# Altium PCB L50T-TEST.PcbDoc (part 3 of 3)
Units mil, origin at the board's own origin, x right, y up, seen from the top; angles counter-clockwise.
Board outline 6860.42 x 9197.04 mil, 2 copper layers (Top Layer, Bottom Layer); 174 components, 146 nets, 565 pads, 293 vias.
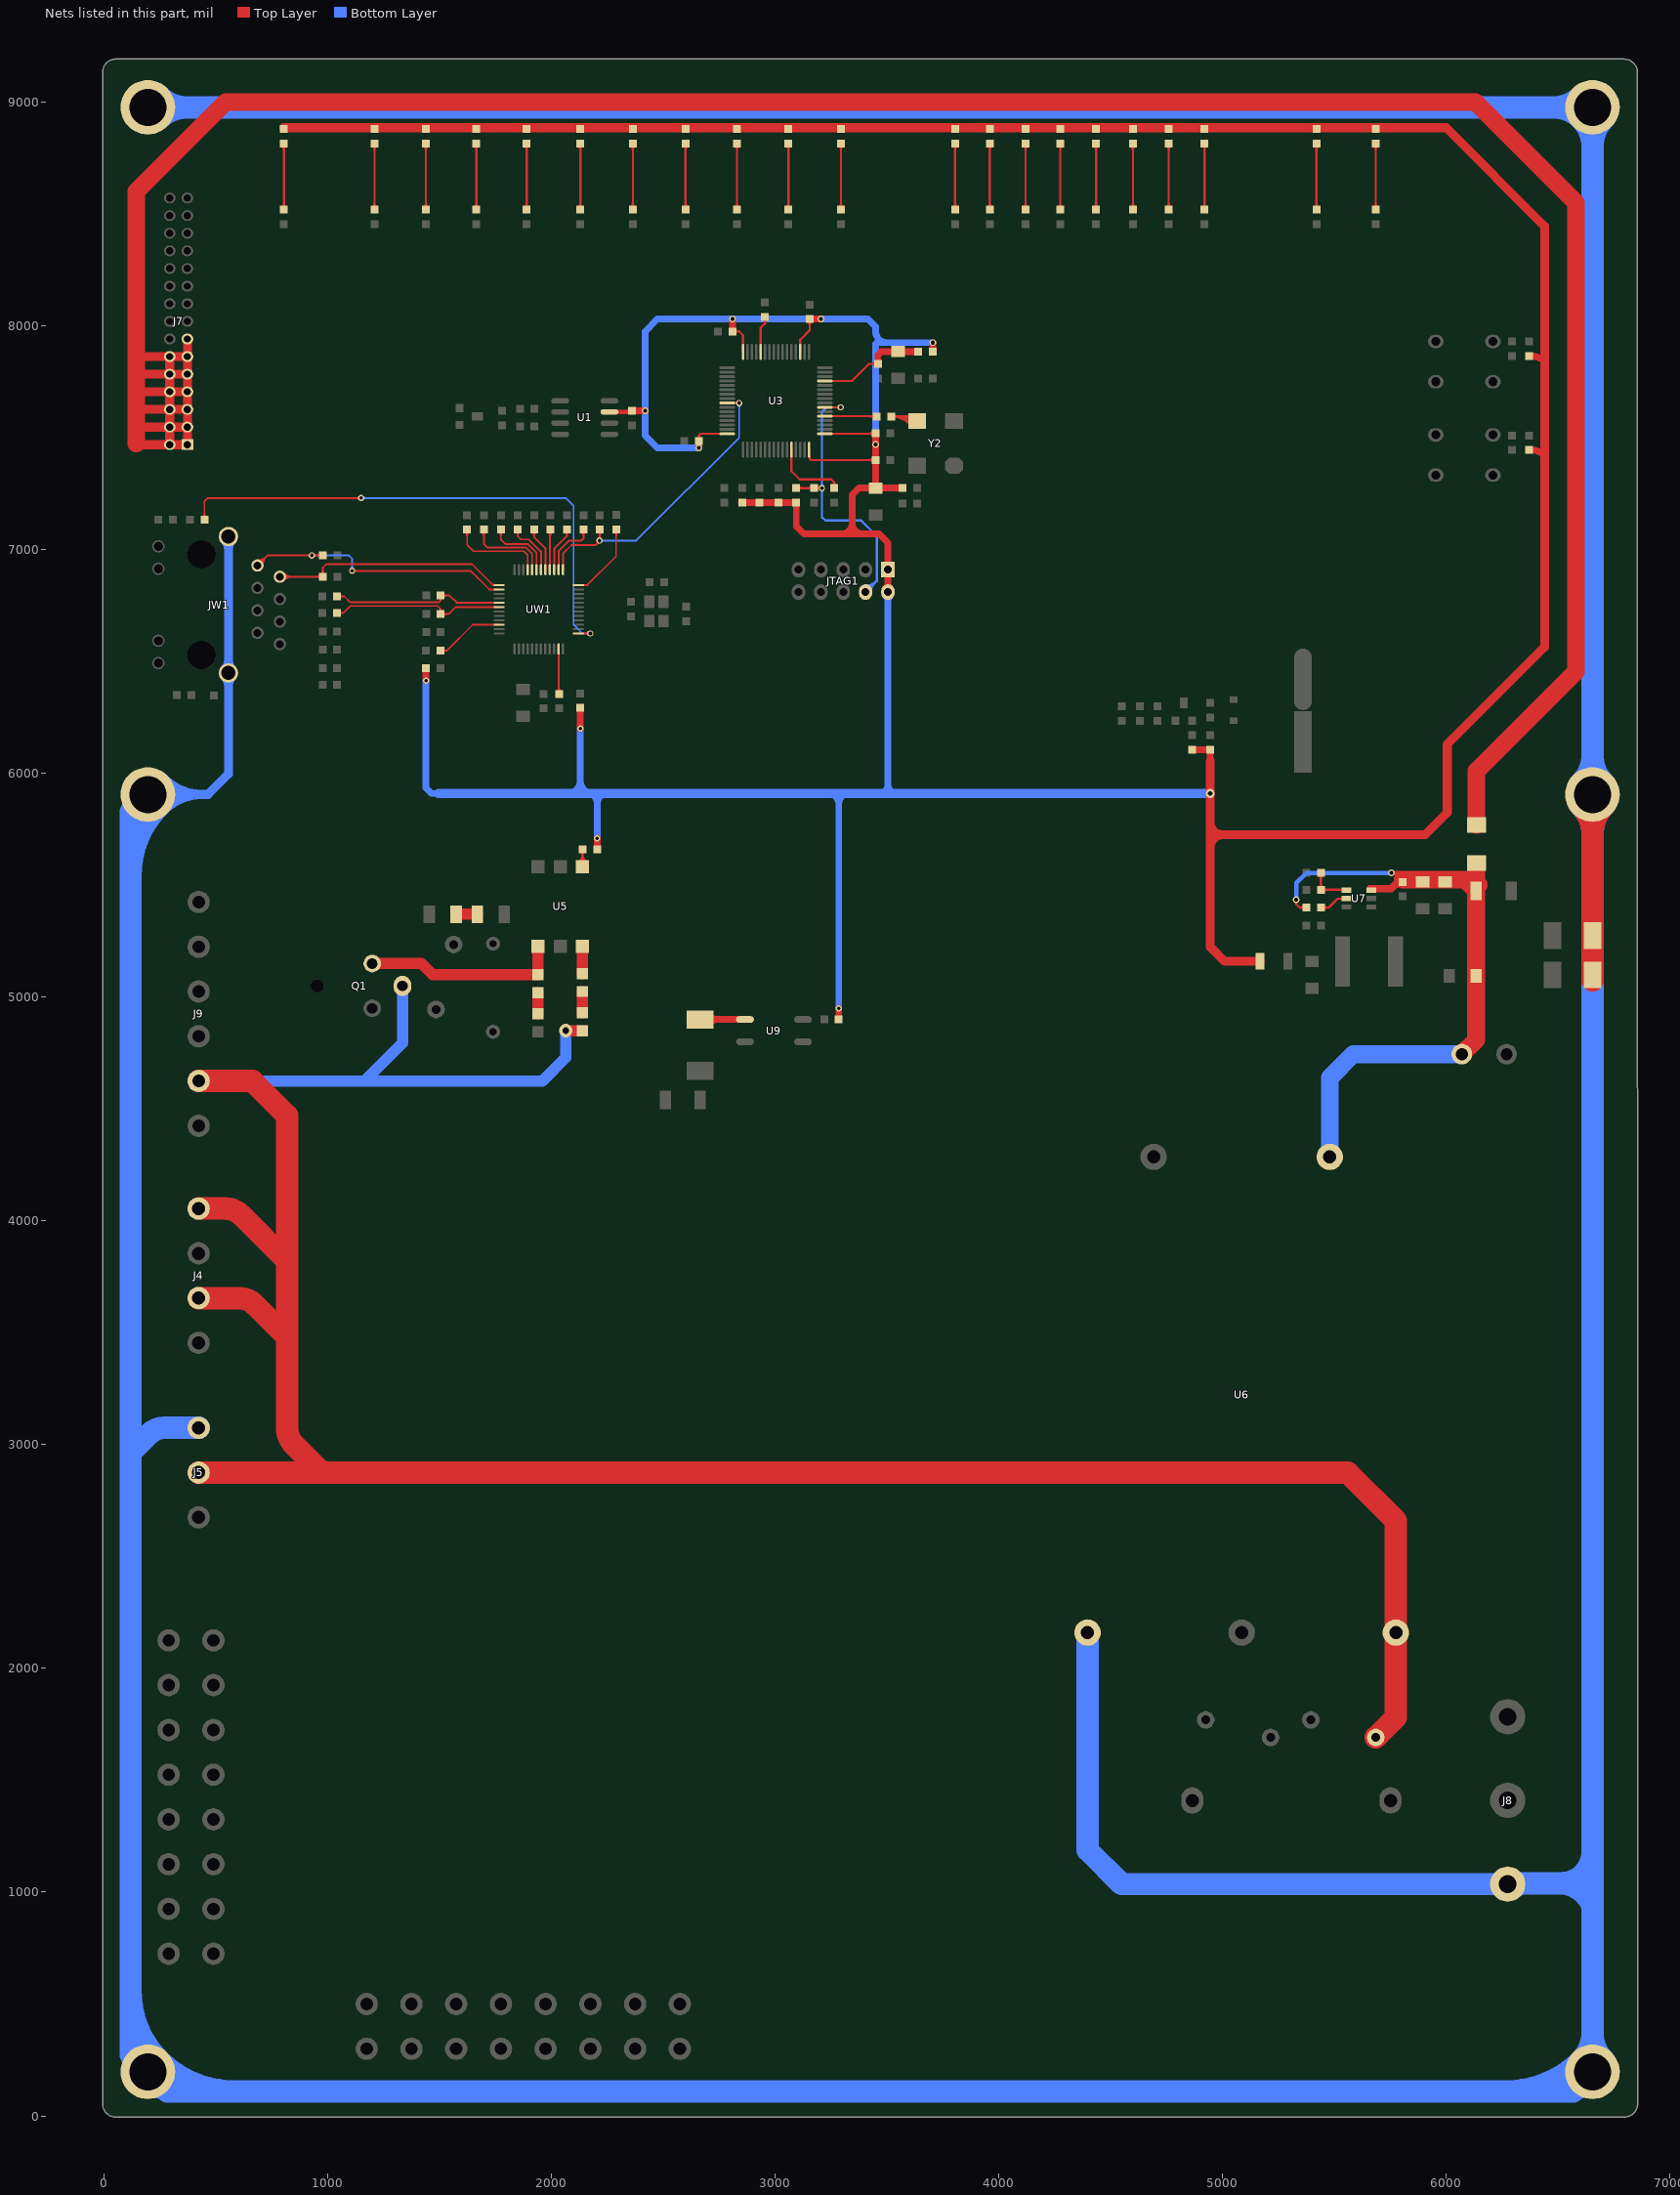
[diagram p3: the nets of this part, all layers, seen from the top]

## Via types
v1: diameter 30, hole 18, Top Layer to Bottom Layer, tented both sides, 242 vias
v2: diameter 28, hole 16, Top Layer to Bottom Layer, tented both sides, 44 vias
v3: diameter 40, hole 20, Top Layer to Bottom Layer, tented both sides, 5 vias
v4: diameter 60, hole 30, Top Layer to Bottom Layer, tented both sides, 2 vias

## Nets (pads, with @x,y where several pads share a name; then routed paths per layer and width w, separated by ;. In a path a pad name is that pad's centre, name@x,y a point inside that pad or via, vN(x,y) a via of type N, cw(c..) or ccw(c..) an arc to the next point about the centre after c; other vN are vias at no path point) (continued)
NetLED1_2: LED1.2 R11.2 | length 484.6
  Top Layer w10: R11.2@1210,8520 LED1.2@1210,8815 ; 1210,8550.18 ccw(c1240.18,8550.18) 1218.84,8528.84 cw(c1240.18,8550.18) 1210,8550.18 ; 1210,8550.18 cw(c1179.82,8550.18) 1201.16,8528.84 ccw(c1179.82,8550.18) 1210,8550.18 ; 1210,8784.82 ccw(c1179.82,8784.82) 1201.16,8806.16 cw(c1179.82,8784.82) 1210,8784.82 ; 1210,8784.82 cw(c1240.18,8784.82) 1218.84,8806.16 ccw(c1240.18,8784.82) 1210,8784.82
NetLED2_2: LED2.2 R12.2 | length 484.6
  Top Layer w10: R12.2@1440,8520 LED2.2@1440,8815 ; 1440,8550.18 ccw(c1470.18,8550.18) 1448.84,8528.84 cw(c1470.18,8550.18) 1440,8550.18 ; 1440,8550.18 cw(c1409.82,8550.18) 1431.16,8528.84 ccw(c1409.82,8550.18) 1440,8550.18 ; 1440,8784.82 ccw(c1409.82,8784.82) 1431.16,8806.16 cw(c1409.82,8784.82) 1440,8784.82 ; 1440,8784.82 cw(c1470.18,8784.82) 1448.84,8806.16 ccw(c1470.18,8784.82) 1440,8784.82
NetLED3_2: LED3.2 R13.2 | length 484.6
  Top Layer w10: R13.2@1665,8520 LED3.2@1665,8815 ; 1665,8550.18 ccw(c1695.18,8550.18) 1673.84,8528.84 cw(c1695.18,8550.18) 1665,8550.18 ; 1665,8550.18 cw(c1634.82,8550.18) 1656.16,8528.84 ccw(c1634.82,8550.18) 1665,8550.18 ; 1665,8784.82 ccw(c1634.82,8784.82) 1656.16,8806.16 cw(c1634.82,8784.82) 1665,8784.82 ; 1665,8784.82 cw(c1695.18,8784.82) 1673.84,8806.16 ccw(c1695.18,8784.82) 1665,8784.82
NetLED4_2: LED4.2 R14.2 | length 484.6
  Top Layer w10: R14.2@1890,8520 LED4.2@1890,8815 ; 1890,8550.18 ccw(c1920.18,8550.18) 1898.84,8528.84 cw(c1920.18,8550.18) 1890,8550.18 ; 1890,8550.18 cw(c1859.82,8550.18) 1881.16,8528.84 ccw(c1859.82,8550.18) 1890,8550.18 ; 1890,8784.82 ccw(c1859.82,8784.82) 1881.16,8806.16 cw(c1859.82,8784.82) 1890,8784.82 ; 1890,8784.82 cw(c1920.18,8784.82) 1898.84,8806.16 ccw(c1920.18,8784.82) 1890,8784.82
NetLED5_2: LED5.2 R15.2 | length 484.6
  Top Layer w10: R15.2@2130,8520 LED5.2@2130,8815 ; 2130,8550.18 ccw(c2160.18,8550.18) 2138.84,8528.84 cw(c2160.18,8550.18) 2130,8550.18 ; 2130,8550.18 cw(c2099.82,8550.18) 2121.16,8528.84 ccw(c2099.82,8550.18) 2130,8550.18 ; 2130,8784.82 ccw(c2099.82,8784.82) 2121.16,8806.16 cw(c2099.82,8784.82) 2130,8784.82 ; 2130,8784.82 cw(c2160.18,8784.82) 2138.84,8806.16 ccw(c2160.18,8784.82) 2130,8784.82
NetLED6_2: LED6.2 R16.2 | length 484.6
  Top Layer w10: R16.2@2365,8520 LED6.2@2365,8815 ; 2365,8550.18 ccw(c2395.18,8550.18) 2373.84,8528.84 cw(c2395.18,8550.18) 2365,8550.18 ; 2365,8550.18 cw(c2334.82,8550.18) 2356.16,8528.84 ccw(c2334.82,8550.18) 2365,8550.18 ; 2365,8784.82 ccw(c2334.82,8784.82) 2356.16,8806.16 cw(c2334.82,8784.82) 2365,8784.82 ; 2365,8784.82 cw(c2395.18,8784.82) 2373.84,8806.16 ccw(c2395.18,8784.82) 2365,8784.82
NetLED7_2: LED7.2 R17.2 | length 484.6
  Top Layer w10: R17.2@2600,8520 LED7.2@2600,8815 ; 2600,8550.18 ccw(c2630.18,8550.18) 2608.84,8528.84 cw(c2630.18,8550.18) 2600,8550.18 ; 2600,8550.18 cw(c2569.82,8550.18) 2591.16,8528.84 ccw(c2569.82,8550.18) 2600,8550.18 ; 2600,8784.82 ccw(c2569.82,8784.82) 2591.16,8806.16 cw(c2569.82,8784.82) 2600,8784.82 ; 2600,8784.82 cw(c2630.18,8784.82) 2608.84,8806.16 ccw(c2630.18,8784.82) 2600,8784.82
NetLED8_2: LED8.2 R18.2 | length 484.6
  Top Layer w10: R18.2@2830,8520 LED8.2@2830,8815 ; 2830,8550.18 ccw(c2860.18,8550.18) 2838.84,8528.84 cw(c2860.18,8550.18) 2830,8550.18 ; 2830,8550.18 cw(c2799.82,8550.18) 2821.16,8528.84 ccw(c2799.82,8550.18) 2830,8550.18 ; 2830,8784.82 ccw(c2799.82,8784.82) 2821.16,8806.16 cw(c2799.82,8784.82) 2830,8784.82 ; 2830,8784.82 cw(c2860.18,8784.82) 2838.84,8806.16 ccw(c2860.18,8784.82) 2830,8784.82
NetLED9_2: LED9.2 R19.2 | length 484.6
  Top Layer w10: R19.2@3060,8520 LED9.2@3060,8815 ; 3060,8550.18 ccw(c3090.18,8550.18) 3068.84,8528.84 cw(c3090.18,8550.18) 3060,8550.18 ; 3060,8550.18 cw(c3029.82,8550.18) 3051.16,8528.84 ccw(c3029.82,8550.18) 3060,8550.18 ; 3060,8784.82 ccw(c3029.82,8784.82) 3051.16,8806.16 cw(c3029.82,8784.82) 3060,8784.82 ; 3060,8784.82 cw(c3090.18,8784.82) 3068.84,8806.16 ccw(c3090.18,8784.82) 3060,8784.82
NetLED10_2: LED10.2 R20.2 | length 484.6
  Top Layer w10: R20.2@3295,8520 LED10.2@3295,8815 ; 3295,8550.18 ccw(c3325.18,8550.18) 3303.84,8528.84 cw(c3325.18,8550.18) 3295,8550.18 ; 3295,8550.18 cw(c3264.82,8550.18) 3286.16,8528.84 ccw(c3264.82,8550.18) 3295,8550.18 ; 3295,8784.82 ccw(c3264.82,8784.82) 3286.16,8806.16 cw(c3264.82,8784.82) 3295,8784.82 ; 3295,8784.82 cw(c3325.18,8784.82) 3303.84,8806.16 ccw(c3325.18,8784.82) 3295,8784.82
NetLED11_2: LED11.2 R23.2 | length 484.6
  Top Layer w10: R23.2@3805,8520 LED11.2@3805,8815 ; 3805,8550.18 ccw(c3835.18,8550.18) 3813.84,8528.84 cw(c3835.18,8550.18) 3805,8550.18 ; 3805,8550.18 cw(c3774.82,8550.18) 3796.16,8528.84 ccw(c3774.82,8550.18) 3805,8550.18 ; 3805,8784.82 ccw(c3774.82,8784.82) 3796.16,8806.16 cw(c3774.82,8784.82) 3805,8784.82 ; 3805,8784.82 cw(c3835.18,8784.82) 3813.84,8806.16 ccw(c3835.18,8784.82) 3805,8784.82
NetLED12_2: LED12.2 R24.2 | length 484.6
  Top Layer w10: R24.2@3960,8520 LED12.2@3960,8815 ; 3960,8550.18 ccw(c3990.18,8550.18) 3968.84,8528.84 cw(c3990.18,8550.18) 3960,8550.18 ; 3960,8550.18 cw(c3929.82,8550.18) 3951.16,8528.84 ccw(c3929.82,8550.18) 3960,8550.18 ; 3960,8784.82 ccw(c3929.82,8784.82) 3951.16,8806.16 cw(c3929.82,8784.82) 3960,8784.82 ; 3960,8784.82 cw(c3990.18,8784.82) 3968.84,8806.16 ccw(c3990.18,8784.82) 3960,8784.82
NetLED13_2: LED13.2 R25.2 | length 484.6
  Top Layer w10: R25.2@4120,8520 LED13.2@4120,8815 ; 4120,8550.18 ccw(c4150.18,8550.18) 4128.84,8528.84 cw(c4150.18,8550.18) 4120,8550.18 ; 4120,8550.18 cw(c4089.82,8550.18) 4111.16,8528.84 ccw(c4089.82,8550.18) 4120,8550.18 ; 4120,8784.82 ccw(c4089.82,8784.82) 4111.16,8806.16 cw(c4089.82,8784.82) 4120,8784.82 ; 4120,8784.82 cw(c4150.18,8784.82) 4128.84,8806.16 ccw(c4150.18,8784.82) 4120,8784.82
NetLED14_2: LED14.2 R26.2 | length 484.6
  Top Layer w10: R26.2@4275,8520 LED14.2@4275,8815 ; 4275,8550.18 ccw(c4305.18,8550.18) 4283.84,8528.84 cw(c4305.18,8550.18) 4275,8550.18 ; 4275,8550.18 cw(c4244.82,8550.18) 4266.16,8528.84 ccw(c4244.82,8550.18) 4275,8550.18 ; 4275,8784.82 ccw(c4244.82,8784.82) 4266.16,8806.16 cw(c4244.82,8784.82) 4275,8784.82 ; 4275,8784.82 cw(c4305.18,8784.82) 4283.84,8806.16 ccw(c4305.18,8784.82) 4275,8784.82
NetLED15_2: LED15.2 R27.2 | length 484.6
  Top Layer w10: R27.2@4435,8520 LED15.2@4435,8815 ; 4435,8550.18 ccw(c4465.18,8550.18) 4443.84,8528.84 cw(c4465.18,8550.18) 4435,8550.18 ; 4435,8550.18 cw(c4404.82,8550.18) 4426.16,8528.84 ccw(c4404.82,8550.18) 4435,8550.18 ; 4435,8784.82 ccw(c4404.82,8784.82) 4426.16,8806.16 cw(c4404.82,8784.82) 4435,8784.82 ; 4435,8784.82 cw(c4465.18,8784.82) 4443.84,8806.16 ccw(c4465.18,8784.82) 4435,8784.82
NetLED16_2: LED16.2 R28.2 | length 484.6
  Top Layer w10: R28.2@4600,8520 LED16.2@4600,8815 ; 4600,8550.18 ccw(c4630.18,8550.18) 4608.84,8528.84 cw(c4630.18,8550.18) 4600,8550.18 ; 4600,8550.18 cw(c4569.82,8550.18) 4591.16,8528.84 ccw(c4569.82,8550.18) 4600,8550.18 ; 4600,8784.82 ccw(c4569.82,8784.82) 4591.16,8806.16 cw(c4569.82,8784.82) 4600,8784.82 ; 4600,8784.82 cw(c4630.18,8784.82) 4608.84,8806.16 ccw(c4630.18,8784.82) 4600,8784.82
NetLED17_2: LED17.2 R29.2 | length 484.6
  Top Layer w10: R29.2@4760,8520 LED17.2@4760,8815 ; 4760,8550.18 ccw(c4790.18,8550.18) 4768.84,8528.84 cw(c4790.18,8550.18) 4760,8550.18 ; 4760,8550.18 cw(c4729.82,8550.18) 4751.16,8528.84 ccw(c4729.82,8550.18) 4760,8550.18 ; 4760,8784.82 ccw(c4729.82,8784.82) 4751.16,8806.16 cw(c4729.82,8784.82) 4760,8784.82 ; 4760,8784.82 cw(c4790.18,8784.82) 4768.84,8806.16 ccw(c4790.18,8784.82) 4760,8784.82
NetLED18_2: LED18.2 R30.2 | length 484.6
  Top Layer w10: R30.2@4920,8520 LED18.2@4920,8815 ; 4920,8550.18 ccw(c4950.18,8550.18) 4928.84,8528.84 cw(c4950.18,8550.18) 4920,8550.18 ; 4920,8550.18 cw(c4889.82,8550.18) 4911.16,8528.84 ccw(c4889.82,8550.18) 4920,8550.18 ; 4920,8784.82 ccw(c4889.82,8784.82) 4911.16,8806.16 cw(c4889.82,8784.82) 4920,8784.82 ; 4920,8784.82 cw(c4950.18,8784.82) 4928.84,8806.16 ccw(c4950.18,8784.82) 4920,8784.82
NetLED19_2: LED19.2 R37.2 | length 484.6
  Top Layer w10: R37.2@5420,8520 LED19.2@5420,8815 ; 5420,8550.18 ccw(c5450.18,8550.18) 5428.84,8528.84 cw(c5450.18,8550.18) 5420,8550.18 ; 5420,8550.18 cw(c5389.82,8550.18) 5411.16,8528.84 ccw(c5389.82,8550.18) 5420,8550.18 ; 5420,8784.82 ccw(c5389.82,8784.82) 5411.16,8806.16 cw(c5389.82,8784.82) 5420,8784.82 ; 5420,8784.82 cw(c5450.18,8784.82) 5428.84,8806.16 ccw(c5450.18,8784.82) 5420,8784.82
NetLED20_2: LED20.2 R38.2 | length 484.6
  Top Layer w10: R38.2@805,8520 LED20.2@805,8815 ; 805,8550.18 ccw(c835.18,8550.18) 813.84,8528.84 cw(c835.18,8550.18) 805,8550.18 ; 805,8550.18 cw(c774.82,8550.18) 796.16,8528.84 ccw(c774.82,8550.18) 805,8550.18 ; 805,8784.82 ccw(c774.82,8784.82) 796.16,8806.16 cw(c774.82,8784.82) 805,8784.82 ; 805,8784.82 cw(c835.18,8784.82) 813.84,8806.16 ccw(c835.18,8784.82) 805,8784.82
NetLED21_2: LED21.2 R48.2 | length 484.6
  Top Layer w10: R48.2@5685,8520 LED21.2@5685,8815 ; 5685,8550.18 ccw(c5715.18,8550.18) 5693.84,8528.84 cw(c5715.18,8550.18) 5685,8550.18 ; 5685,8550.18 cw(c5654.82,8550.18) 5676.16,8528.84 ccw(c5654.82,8550.18) 5685,8550.18 ; 5685,8784.82 ccw(c5654.82,8784.82) 5676.16,8806.16 cw(c5654.82,8784.82) 5685,8784.82 ; 5685,8784.82 cw(c5715.18,8784.82) 5693.84,8806.16 ccw(c5715.18,8784.82) 5685,8784.82
NetQ1_3: Q1.3 R32.1 U5.4 | length 888.5
  Top Layer w50: Q1.3@1200,5150 1420,5150 1470,5100 R32.1@1940,5100 U5.4@1940,5227.83
NetR1_1: R1.1 U3.60 | length 402.2
  Top Layer w10: U3.60@3073.9,7446.5 3073.9,7351.1 3111,7314 3251,7314 3265,7300 ; R1.1@3265,7275 3265,7300 ; 3265,7300 ccw(c3283.75,7300) 3272.5,7285 cw(c3283.75,7300) 3265,7300 ; 3265,7300 cw(c3246.25,7300) 3257.5,7285 ccw(c3246.25,7300) 3265,7300
NetR9_2: R9.2 Y2.3 | length 819.6
  Top Layer w10: Y2.3@3635,7575 3615,7595 R9.2@3520,7595 ; R9.2@3520,7595 cw(c3520.01,7477.94) 3608.15,7554.97 ccw(c3520.01,7477.94) R9.2@3520,7595 ; 3550.18,7595 ccw(c3550.18,7564.82) 3528.84,7586.16 cw(c3550.18,7564.82) 3550.18,7595 ; 3550.18,7595 cw(c3550.18,7625.18) 3528.84,7603.84 ccw(c3550.18,7625.18) 3550.18,7595 ; 3542.03,7595 cw(c3542.03,7497.18) 3615.68,7561.55 ccw(c3542.03,7497.18) 3542.03,7595 ; 3564.05,7595 cw(c3564.05,7516.43) 3623.21,7568.13 ccw(c3564.05,7516.43) 3564.05,7595 ; 3586.07,7595 cw(c3586.07,7535.67) 3630.74,7574.72 ccw(c3586.07,7535.67) 3586.07,7595
NetR21_2: R21.2 U5.1 | length 468.9
  Top Layer w10: U5.1@2140,5582.17 R21.2@2140,5660 ; 2140,5617.24 ccw(c2175.07,5617.24) 2150.27,5592.44 cw(c2175.07,5617.24) 2140,5617.24 ; 2140,5617.24 cw(c2104.93,5617.24) 2129.73,5592.44 ccw(c2104.93,5617.24) 2140,5617.24 ; 2140,5629.82 ccw(c2109.82,5629.82) 2131.16,5651.16 cw(c2109.82,5629.82) 2140,5629.82 ; 2140,5629.82 cw(c2170.18,5629.82) 2148.84,5651.16 ccw(c2170.18,5629.82) 2140,5629.82 ; 2140,5641.38 ccw(c2199.21,5641.38) 2157.34,5599.51 cw(c2199.21,5641.38) 2140,5641.38 ; 2140,5641.38 cw(c2080.79,5641.38) 2122.66,5599.51 ccw(c2080.79,5641.38) 2140,5641.38
NetR22_2: R22.2 R33.1 | length 95
  Top Layer w50: R22.2@1575,5370 R33.1@1670,5370
NetR31_1: R31.1 U5.6 | length 122.8
  Top Layer w50: R31.1@2140,5105 U5.6@2140,5227.83
NetR31_2: R31.2 R34.1 | length 95
  Top Layer w50: R34.1@2140,4930 R31.2@2140,5025
NetR32_2: R32.2 R35.1 | length 95
  Top Layer w50: R35.1@1940,4925 R32.2@1940,5020
NetR39_1: R39.1 U7.5 | length 277.9
  Top Layer w10: R39.1@5440,5400 5475,5400 5515,5440 U7.5@5554.88,5440 ; 5470.18,5400 ccw(c5470.18,5369.82) 5448.84,5391.16 cw(c5470.18,5369.82) 5470.18,5400 ; 5470.18,5400 cw(c5470.18,5430.18) 5448.84,5408.84 ccw(c5470.18,5430.18) 5470.18,5400 ; 5528.6,5440 ccw(c5528.6,5456.44) 5540.22,5444.82 cw(c5528.6,5456.44) 5528.6,5440 ; 5528.6,5440 cw(c5528.6,5423.56) 5540.22,5435.18 ccw(c5528.6,5423.56) 5528.6,5440
NetR43_2: R43.2 R44.1 U7.4 | length 515.5
  Top Layer w10: R44.1@5440,5555 R43.2@5440,5480 5552.28,5480 cw(c5552.28,5477.4) U7.4@5554.88,5477.4 ; 5440,5510.18 ccw(c5470.18,5510.18) R43.2@5448.84,5488.84 ; 5440,5510.18 cw(c5409.82,5510.18) 5431.16,5488.84 ccw(c5409.82,5510.18) 5440,5510.18 ; 5440,5510.18 ccw(c5470.18,5510.18) R43.2@5448.84,5488.84 ; 5440,5524.82 ccw(c5409.82,5524.82) 5431.16,5546.16 cw(c5409.82,5524.82) 5440,5524.82 ; 5440,5524.82 cw(c5470.18,5524.82) 5448.84,5546.16 ccw(c5470.18,5524.82) 5440,5524.82 ; R43.2@5448.84,5488.84 ccw(c5470.18,5510.18) 5470.18,5480 ; R43.2@5448.84,5488.84 ccw(c5470.18,5510.18) 5470.18,5480 ; 5470.18,5480 ccw(c5470.18,5449.82) 5448.84,5471.16 cw(c5470.18,5449.82) 5470.18,5480 ; 5522.32,5480 cw(c5522.32,5454.69) 5540.22,5472.59 ccw(c5522.32,5454.69) 5522.32,5480
NetR45_2: R45.2 U9.1 | length 390.6
  Top Layer w30: R45.2@2665,4900 U9.1@2866,4900 ; 2745.36,4900 ccw(c2745.36,4839.64) 2702.68,4882.32 cw(c2745.36,4839.64) 2745.36,4900 ; 2745.36,4900 cw(c2745.36,4960.36) 2702.68,4917.68 ccw(c2745.36,4960.36) 2745.36,4900
NetRW1_1: RW1.1 UW1.10 | length 394.8
  Top Layer w8: RW1.1@1505,6549 1534,6549 ; UW1.10@1767,6664.26 1649.26,6664.26 1534,6549 ; 1534,6549 ccw(c1534,6524.61) 1515.33,6540.31 cw(c1534,6524.61) 1534,6549 ; 1534,6549 cw(c1534,6573.39) 1515.33,6557.69 ccw(c1534,6573.39) 1534,6549
NetRW2_1: RW2.1 UW1.23 | length 337.3
  Top Layer w8: UW1.23@2032.75,6555.99 2032.75,6357.25 RW2.1@2035,6355 ; RW2.1@2025.45,6364.55 ccw(c2007.84,6382.16) 2032.75,6382.16 cw(c2007.84,6382.16) RW2.1@2025.45,6364.55 ; 2032.75,6373.72 ccw(c2053.72,6373.72) 2038.89,6358.89 cw(c2053.72,6373.72) 2032.75,6373.72 ; 2032.75,6393.03 ccw(c2073.03,6393.03) 2044.55,6364.55 cw(c2073.03,6393.03) 2032.75,6393.03
NetRW3_2: RW3.2 UW1.42 | length 327.3
  Top Layer w8: RW3.2@1850,7089 1850,7060 ; UW1.42@1954.01,6910.32 1954.01,6990.99 1900,7045 1865,7045 1850,7060 ; 1850,7060 ccw(c1825.61,7060) 1841.31,7078.67 cw(c1825.61,7060) 1850,7060 ; 1850,7060 cw(c1874.39,7060) 1858.69,7078.67 ccw(c1874.39,7060) 1850,7060
NetRW4_2: RW4.2 UW1.41 | length 300.7
  Top Layer w8: RW4.2@1923.33,7089 1923.33,7056.67 ; UW1.41@1973.69,6910.32 1973.69,7006.31 1923.33,7056.67 ; 1923.33,7056.67 ccw(c1891.37,7056.67) 1913.84,7079.4 cw(c1891.37,7056.67) 1923.33,7056.67 ; 1923.33,7056.67 cw(c1955.3,7056.67) 1932.82,7079.4 ccw(c1955.3,7056.67) 1923.33,7056.67
NetRW5_2: RW5.2 UW1.40 | length 320.9
  Top Layer w8: UW1.40@1993.38,6910.32 1993.38,7085.71 RW5.2@1996.67,7089 ; RW5.2@1987.12,7079.45 cw(c1972.01,7064.35) 1993.38,7064.35 ccw(c1972.01,7064.35) RW5.2@1987.12,7079.45 ; 1993.38,7048.47 cw(c2037.2,7048.47) 2006.21,7079.45 ccw(c2037.2,7048.47) 1993.38,7048.47 ; 1993.38,7067.78 cw(c2017.88,7067.78) 2000.56,7085.11 ccw(c2017.88,7067.78) 1993.38,7067.78
NetRW6_2: RW6.2 UW1.39 | length 287.3
  Top Layer w8: UW1.39@2013.06,6910.32 2013.06,7003.06 2070,7060 ; RW6.2@2070,7089 2070,7060 ; 2070,7060 ccw(c2045.61,7060) 2061.31,7078.67 cw(c2045.61,7060) 2070,7060 ; 2070,7060 cw(c2094.39,7060) 2078.69,7078.67 ccw(c2094.39,7060) 2070,7060
NetRW7_2: RW7.2 UW1.38 | length 359.4
  Top Layer w8: UW1.38@2032.75,6910.32 2032.75,6992.75 2080,7040 2135,7040 2144,7049 RW7.2@2144,7089 ; 2144,7056.41 ccw(c2111.41,7056.41) 2134.45,7079.45 cw(c2111.41,7056.41) 2144,7056.41 ; 2144,7056.41 cw(c2176.59,7056.41) 2153.55,7079.45 ccw(c2176.59,7056.41) 2144,7056.41
NetRW9_1: RW9.1 UW1.36 | length 444.3
  Top Layer w8: UW1.36@2121.33,6841.42 2161.42,6841.42 2290,6970 RW9.1@2290,7090 ; 2290,7057.41 ccw(c2257.41,7057.41) 2280.45,7080.45 cw(c2257.41,7057.41) 2290,7057.41 ; 2290,7057.41 cw(c2322.59,7057.41) 2299.55,7080.45 ccw(c2322.59,7057.41) 2290,7057.41
NetRW11_1: RW11.1 UW1.45 | length 525.1
  Top Layer w8: RW11.1@1624,7089 1624,7021 1652,6993 1877,6993 1894.95,6975.05 UW1.45@1894.95,6910.32 ; 1624,7056.41 ccw(c1591.41,7056.41) 1614.45,7079.45 cw(c1591.41,7056.41) 1624,7056.41 ; 1624,7056.41 cw(c1656.59,7056.41) 1633.55,7079.45 ccw(c1656.59,7056.41) 1624,7056.41
NetRW12_1: RW12.1 UW1.44 | length 471.4
  Top Layer w8: RW12.1@1699,7089 1699,7026 1716,7009 1888.37,7009 1914.64,6982.73 UW1.44@1914.64,6910.32 ; 1699,7056.41 ccw(c1666.41,7056.41) 1689.45,7079.45 cw(c1666.41,7056.41) 1699,7056.41 ; 1699,7056.41 cw(c1731.59,7056.41) 1708.55,7079.45 ccw(c1731.59,7056.41) 1699,7056.41
NetRW13_1: RW13.1 UW1.43 | length 405.6
  Top Layer w8: RW13.1@1775,7089 1775,7045 1795,7025 1895,7025 1934.32,6985.68 UW1.43@1934.32,6910.32 ; 1775,7056.41 ccw(c1742.41,7056.41) 1765.45,7079.45 cw(c1742.41,7056.41) 1775,7056.41 ; 1775,7056.41 cw(c1807.59,7056.41) 1784.55,7079.45 ccw(c1807.59,7056.41) 1775,7056.41
nLINKLED: RW17.2 UW1.25 | length 2833.8
  Top Layer w8: RW17.2@450,7133 450,7215 465,7230 v2(1150,7230) ; UW1.25@2121.33,6624.89 2174.89,6624.89 v2(2175,6625) ; 450,7165.59 ccw(c482.59,7165.59) 459.55,7142.55 cw(c482.59,7165.59) 450,7165.59 ; 450,7165.59 cw(c417.41,7165.59) 440.45,7142.55 ccw(c417.41,7165.59) 450,7165.59 ; 1125.86,7230 ccw(c1125.86,7254.14) 1142.93,7237.07 cw(c1125.86,7254.14) 1125.86,7230 ; 1125.86,7230 cw(c1125.86,7205.86) 1142.93,7222.93 ccw(c1125.86,7205.86) 1125.86,7230 ; 2150.59,6624.89 ccw(c2150.59,6649.41) 2167.93,6632.07 cw(c2150.59,6649.41) 2150.59,6624.89 ; 2151.12,6624.89 cw(c2151.12,6601.12) 2167.93,6617.93 ccw(c2151.12,6601.12) 2151.12,6624.89
  Bottom Layer w8: v2(1150,7230) 2065,7230 2100,7195 2100,6665 2140,6625 v2(2175,6625) ; 1174.14,7230 ccw(c1174.14,7205.86) 1157.07,7222.93 cw(c1174.14,7205.86) 1174.14,7230 ; 1174.14,7230 cw(c1174.14,7254.14) 1157.07,7237.07 ccw(c1174.14,7254.14) 1174.14,7230 ; 2150.86,6625 ccw(c2150.86,6649.14) 2167.93,6632.07 cw(c2150.86,6649.14) 2150.86,6625 ; 2150.86,6625 cw(c2150.86,6600.86) 2167.93,6617.93 ccw(c2150.86,6600.86) 2150.86,6625
NRST: C11.2 JTAG1.4 R10.1 U3.7 | length 2185.3
  Top Layer w10: R10.1@3095,7275 C11.2@3175,7275 v2(3210,7275) ; U3.7@3223.03,7635 U3.7@3223.5,7635.47 v2(3294.53,7635.47) ; 3125.18,7275 ccw(c3125.18,7244.82) 3103.84,7266.16 cw(c3125.18,7244.82) 3125.18,7275 ; 3125.18,7275 cw(c3125.18,7305.18) 3103.84,7283.84 ccw(c3125.18,7305.18) 3125.18,7275 ; 3144.82,7275 ccw(c3144.82,7305.18) 3166.16,7283.84 cw(c3144.82,7305.18) 3144.82,7275 ; 3144.82,7275 cw(c3144.82,7244.82) 3166.16,7266.16 ccw(c3144.82,7244.82) 3144.82,7275 ; C11.2@3188.27,7275 ccw(c3188.27,7296.73) 3203.64,7281.36 cw(c3188.27,7296.73) C11.2@3188.27,7275 ; C11.2@3188.27,7275 cw(c3188.27,7253.27) 3203.64,7268.64 ccw(c3188.27,7253.27) C11.2@3188.27,7275 ; v2@3205.18,7275 ccw(c3205.18,7244.82) 3183.84,7266.16 cw(c3205.18,7244.82) v2@3205.18,7275 ; v2@3205.18,7275 cw(c3205.18,7305.18) 3183.84,7283.84 ccw(c3205.18,7305.18) v2@3205.18,7275 ; 3272.8,7635.47 ccw(c3272.8,7657.2) 3288.16,7641.84 cw(c3272.8,7657.2) 3272.8,7635.47 ; 3272.8,7635.47 cw(c3272.8,7613.74) 3288.16,7629.11 ccw(c3272.8,7613.74) 3272.8,7635.47
  Bottom Layer w10: v2(3294.53,7635.47) 3230.47,7635.47 3210,7615 v2(3210,7275) 3210,7145 3225,7130 3385,7130 3455,7060 3455,6860 ; JTAG1.4@3405,6810 3455,6860 ; 3210,7253.27 ccw(c3188.27,7253.27) 3203.64,7268.64 cw(c3188.27,7253.27) 3210,7253.27 ; 3210,7253.27 cw(c3231.73,7253.27) 3216.36,7268.64 ccw(c3231.73,7253.27) 3210,7253.27 ; 3210,7296.73 ccw(c3231.73,7296.73) 3216.36,7281.36 cw(c3231.73,7296.73) 3210,7296.73 ; 3210,7296.73 cw(c3188.27,7296.73) 3203.64,7281.36 ccw(c3188.27,7296.73) 3210,7296.73 ; 3272.8,7635.47 ccw(c3272.8,7657.2) 3288.16,7641.84 cw(c3272.8,7657.2) 3272.8,7635.47 ; 3272.8,7635.47 cw(c3272.8,7613.74) 3288.16,7629.11 ccw(c3272.8,7613.74) 3272.8,7635.47 ; 3455,6860 cw(c3406.68,6908.31) 3405.45,6840 ccw(c3406.68,6908.31) 3455,6860 ; JTAG1.4@3405.27,6830 ccw(c3406.09,6875.61) 3438.35,6843.35 cw(c3406.09,6875.61) JTAG1.4@3405.27,6830 ; JTAG1.4@3430,6815 cw(c3478.28,6815) 3444.14,6849.14 ccw(c3478.28,6815) JTAG1.4@3430,6815
OSC_IN: R9.1 U3.5 | length 326.8
  Top Layer w10: U3.5@3223.5,7596.1 3453.9,7596.1 R9.1@3455,7595 ; 3422.16,7596.1 cw(c3422.16,7562.16) 3446.16,7586.16 ccw(c3422.16,7562.16) 3422.16,7596.1 ; 3427.48,7596.1 ccw(c3427.48,7622.52) 3446.16,7603.84 cw(c3427.48,7622.52) 3427.48,7596.1
PG: C25.1 I1.1 I2.1 I3.1 I4.1 I5.1 I6.1 J5.3 J8.3 JW1.13 JW1.14 R49.1 U6.1 | length 43700.9
  Top Layer w100: I2.1@6653.54,5905.51 6655,5904.06 C25.1@6655,5275 R49.1@6655,5075 ; I2.1@6602.6,5854.57 cw(c6476.09,5728.06) 6655,5728.06 ccw(c6476.09,5728.06) I2.1@6602.6,5854.57 ; 6655,5735.09 cw(c6823.96,5735.09) 6704.49,5854.57 ccw(c6823.96,5735.09) 6655,5735.09
  Bottom Layer w40: I5.1@196.85,5905.51 465.51,5905.51 557.08,5997.08 JW1.13@557.08,6448.67 JW1.14@557.08,7058.51 ; 346.65,5905.51 ccw(c346.65,5755.72) 240.72,5861.64 cw(c346.65,5755.72) 346.65,5905.51 ; 346.65,5905.51 cw(c346.65,6055.31) 240.72,5949.39 ccw(c346.65,6055.31) 346.65,5905.51 ; 443.21,5905.51 ccw(c443.21,5659.15) 269.01,5833.35 cw(c443.21,5659.15) 443.21,5905.51 ; 443.21,5905.51 cw(c443.21,6151.88) 269.01,5977.67 ccw(c443.21,6151.88) 443.21,5905.51 ; 557.08,6392.4 ccw(c500.81,6392.4) 540.6,6432.19 cw(c500.81,6392.4) 557.08,6392.4 ; 557.08,6392.4 cw(c613.35,6392.4) 573.56,6432.19 ccw(c613.35,6392.4) 557.08,6392.4 ; 557.08,6504.94 ccw(c613.35,6504.94) 573.56,6465.15 cw(c613.35,6504.94) 557.08,6504.94 ; 557.08,6504.94 cw(c500.81,6504.94) 540.6,6465.15 ccw(c500.81,6504.94) 557.08,6504.94 ; 557.08,7002.24 ccw(c500.81,7002.24) 540.6,7042.03 cw(c500.81,7002.24) 557.08,7002.24 ; 557.08,7002.24 cw(c613.35,7002.24) 573.56,7042.03 ccw(c613.35,7002.24) 557.08,7002.24
  Bottom Layer w100: I5.1@196.85,5905.51 120,5828.66 120,2965 ; I4.1@196.85,8976.38 I3.1@6653.54,8976.38 I2.1@6653.54,5905.51 I1.1@6653.54,196.85 6566.69,110 283.7,110 120,273.7 120,2965 ; J5.3@424,3075 271.42,3075 ccw(c271.42,2975) 200.71,3045.71 120,2965 ; U6.1@4397.05,2160 4397.05,1187.95 4549.02,1035.98 J8.3@6275,1035.98 cw(c6284.69,1026.29) 6284.69,1040 6653.54,1040 ; J8.3@6295.32,1015.66 cw(c6354.08,956.9) 6354.08,1040 ; 6649.43,948.03 ccw(c6502.5,877.5) 6515,1040 ccw(c6514.27,1179.27) 6653.54,1180 ; I6.1@177.08,177.08 cw(c314.9,314.9) 120,314.9 ccw(c314.9,314.9) I6.1@177.08,177.08 ; I6.1@177.08,177.08 ccw(c339.04,339.04) 339.04,110 cw(c339.04,339.04) I6.1@177.08,177.08 ; I6.1@247.8,247.8 cw(c556.32,556.32) 120,556.32 ccw(c556.32,556.32) I6.1@247.8,247.8 ; I6.1@247.8,247.8 ccw(c580.46,580.46) 580.46,110 cw(c580.46,580.46) I6.1@247.8,247.8 ; 370.79,8976.38 ccw(c370.79,8802.44) 247.8,8925.43 cw(c370.79,8802.44) 370.79,8976.38 ; 370.79,8976.38 cw(c370.79,9150.32) 247.8,9027.32 ccw(c370.79,9150.32) 370.79,8976.38 ; 6479.61,8976.38 ccw(c6479.61,9150.32) 6602.6,9027.32 cw(c6479.61,9150.32) 6479.61,8976.38 ; 6479.61,8976.38 cw(c6479.61,8802.44) I3.1@6602.6,8925.43 ; 6479.61,8976.38 cw(c6479.61,8802.44) I3.1@6602.6,8925.43 ; I1.1@6602.6,247.8 ccw(c6479.61,370.79) 6653.54,370.79 ; I1.1@6602.6,247.8 cw(c6269.93,580.46) 6269.93,110 ccw(c6269.93,580.46) I1.1@6602.6,247.8 ; I1.1@6602.6,247.8 ccw(c6479.61,370.79) 6653.54,370.79 ; I3.1@6602.6,8925.43 cw(c6479.61,8802.44) 6653.54,8802.44 ; I3.1@6602.6,8925.43 cw(c6479.61,8802.44) 6653.54,8802.44 ; 6653.54,370.79 ccw(c6827.48,370.79) 6704.49,247.8 cw(c6827.48,370.79) 6653.54,370.79 ; 6653.54,5731.57 ccw(c6479.61,5731.57) 6602.6,5854.57 cw(c6479.61,5731.57) 6653.54,5731.57 ; 6653.54,5731.57 cw(c6827.48,5731.57) 6704.49,5854.57 ccw(c6827.48,5731.57) 6653.54,5731.57 ; 6653.54,6079.45 ccw(c6827.48,6079.45) 6704.49,5956.46 cw(c6827.48,6079.45) 6653.54,6079.45 ; 6653.54,6079.45 cw(c6479.61,6079.45) 6602.6,5956.46 ccw(c6479.61,6079.45) 6653.54,6079.45 ; 6653.54,8802.44 cw(c6827.48,8802.44) 6704.49,8925.43 ccw(c6827.48,8802.44) 6653.54,8802.44 ; 120,5546.04 cw(c556.32,5546.04) 247.8,5854.57 ccw(c556.32,5546.04) 120,5546.04 ; 120,5787.46 cw(c314.9,5787.46) 177.08,5925.28 ccw(c314.9,5787.46) 120,5787.46 ; 6511.35,110 ccw(c6511.35,339.04) 6673.31,177.08 cw(c6511.35,339.04) 6511.35,110
RD+: CW6.2 RW19.2 UW1.5 | length 1028.5
  Top Layer w8: CW6.2@1042,6791 1075,6791 1101,6765 1492,6765 1498,6765 1506,6773 ; UW1.5@1767,6762.68 1577.32,6762.68 1545,6795 RW19.2@1506,6795 1506,6773 ; 1074.59,6791 ccw(c1074.59,6758.41) 1051.55,6781.45 cw(c1074.59,6758.41) 1074.59,6791 ; 1074.59,6791 cw(c1074.59,6823.59) 1051.55,6800.55 ccw(c1074.59,6823.59) 1074.59,6791 ; 1506,6773 ccw(c1494.83,6773) 1499.89,6782.96 cw(c1494.83,6773) 1506,6773 ; 1506,6773 cw(c1517.17,6773) 1512.11,6782.96 ccw(c1517.17,6773) 1506,6773 ; 1538.59,6795 ccw(c1538.59,6762.41) 1515.55,6785.45 cw(c1538.59,6762.41) 1538.59,6795 ; 1538.59,6795 cw(c1538.59,6827.59) 1515.55,6804.55 ccw(c1538.59,6827.59) 1538.59,6795
RD-: CW7.2 RW15.2 UW1.6 | length 1020
  Top Layer w8: CW7.2@1042,6717 1072,6717 ; UW1.6@1767,6743 1573,6743 1542,6712 RW15.2@1506,6712 1506,6734 ; 1072,6717 ccw(c1072,6690.42) 1052.1,6708.05 cw(c1072,6690.42) 1072,6717 ; 1072,6717 cw(c1072,6743.58) 1052.1,6725.95 ccw(c1072,6743.58) 1072,6717 ; 1072,6717 1103,6748 1484.96,6748 1492,6748 1506,6734 ; 1506,6734 ccw(c1517.17,6734) 1512.11,6724.04 cw(c1517.17,6734) 1506,6734 ; 1506,6734 cw(c1494.83,6734) 1499.89,6724.04 ccw(c1494.83,6734) 1506,6734 ; 1538.59,6712 ccw(c1538.59,6679.41) 1515.55,6702.45 cw(c1538.59,6679.41) 1538.59,6712 ; 1538.59,6712 cw(c1538.59,6744.59) 1515.55,6721.55 ccw(c1538.59,6744.59) 1538.59,6712
RST_W5500: RW8.1 U3.41 UW1.37 | length 1790.5
  Top Layer w8: UW1.37@2052.43,6910.32 2052.43,6982.43 2090,7020 2200,7020 2217,7037 RW8.1@2217,7089 ; U3.41@2786.5,7655.16 2839.84,7655.16 v2(2840,7655) ; 2217,7056.41 ccw(c2184.41,7056.41) 2207.45,7079.45 cw(c2184.41,7056.41) 2217,7056.41 ; 2217,7056.41 cw(c2249.59,7056.41) 2226.55,7079.45 ccw(c2249.59,7056.41) 2217,7056.41 ; 2202.5,7022.5 ccw(c2193.03,7031.97) 2205.61,7036.57 cw(c2193.03,7031.97) 2202.5,7022.5 ; 2206.46,7026.46 cw(c2215,7017.93) 2215,7030 ccw(c2215,7017.93) 2206.46,7026.46 ; v2@2207.93,7047.07 ccw(c2186.03,7068.97) 2217,7068.97 cw(c2186.03,7068.97) v2@2207.93,7047.07 ; 2217,7059.31 ccw(c2234.31,7059.31) 2222.07,7047.07 cw(c2234.31,7059.31) 2217,7059.31 ; U3.41@2815.48,7655.16 cw(c2815.48,7630.48) 2832.93,7647.93 ccw(c2815.48,7630.48) U3.41@2815.48,7655.16 ; U3.41@2816.24,7655.16 ccw(c2816.24,7678.76) 2832.93,7662.07 cw(c2816.24,7678.76) U3.41@2816.24,7655.16
  Bottom Layer w8: v2(2215,7040) 2380,7040 2840,7500 v2(2840,7655) ; 2239.14,7040 ccw(c2239.14,7015.86) 2222.07,7032.93 cw(c2239.14,7015.86) 2239.14,7040 ; 2239.14,7040 cw(c2239.14,7064.14) 2222.07,7047.07 ccw(c2239.14,7064.14) 2239.14,7040 ; 2840,7630.86 ccw(c2815.86,7630.86) 2832.93,7647.93 cw(c2815.86,7630.86) 2840,7630.86 ; 2840,7630.86 cw(c2864.14,7630.86) 2847.07,7647.93 ccw(c2864.14,7630.86) 2840,7630.86
SPS12V: C13.2 C14.2 C16.1 C20.1 C21.1 D4.2 D5.1 R39.2 U6.8 U7.3 | length 3804.3
  Top Layer w10: v1(5330,5435) 5330,5415 ; R39.2@5375,5400 5345,5400 ; v1@5324,5427 cw(c5315,5415) 5330,5415 ; v1@5324,5427 cw(c5315,5415) 5330,5415 ; v1@5324,5427 cw(c5315,5415) 5330,5415 ; v1@5324,5427 cw(c5315,5415) 5330,5415 ; 5330,5415 cw(c5345,5415) v1@5336,5427 ; 5330,5415 cw(c5345,5415) v1@5336,5427 ; 5330,5415 cw(c5345,5415) v1@5336,5427 ; 5330,5415 cw(c5345,5415) v1@5336,5427 ; 5330,5415 5345,5400 ; 5345,5400 ccw(c5345,5429.75) 5366.12,5408.8 cw(c5345,5429.75) 5345,5400 ; 5345,5400 cw(c5345,5370.25) 5366.12,5391.2 ccw(c5345,5370.25) 5345,5400
  Top Layer w20: 5655,5490 5750,5490 5775,5515 C16.1@5795,5515 ; U7.3@5665.12,5477.4 5757.4,5477.4 C16.1@5795,5515 ; v1(5755,5555) 5810,5555 ; C16.1@5805,5515 C16.1@5795,5515 ; C16.1@5805,5525 C16.1@5795,5515 ; 5786.89,5515 ccw(c5786.89,5533.11) 5799.7,5520.3 cw(c5786.89,5533.11) 5786.89,5515 ; 5786.89,5515 cw(c5786.89,5496.89) 5799.7,5509.7 ccw(c5786.89,5496.89) 5786.89,5515 ; U7.3@5676.24,5476.12 cw(c5709.75,5442.61) 5709.75,5490 ccw(c5709.75,5442.61) U7.3@5676.24,5476.12 ; 5775.13,5495.13 cw(c5805,5465.25) 5805,5507.5 ccw(c5805,5465.25) 5775.13,5495.13
  Top Layer w80: C16.1@5805,5525 6084.09,5525 D4.2@6134.09,5475 ; C21.1@6070,4745 6134.09,4809.09 D4.2@6134.09,5475 ; D5.1@6135,5570 6134.09,5569.09 D4.2@6134.09,5475 ; 6089.04,5525 cw(c6089.04,5446.29) D4.2@6144.7,5501.95 ; 6089.04,5525 cw(c6089.04,5446.29) D4.2@6144.7,5501.95 ; 6089.04,5525 cw(c6089.04,5446.29) D4.2@6144.7,5501.95 ; 6089.04,5525 cw(c6089.04,5446.29) D4.2@6144.7,5501.95
  Bottom Layer w20: v1(5330,5435) 5330,5510 5375,5555 v1(5755,5555)
  Bottom Layer w80: U6.8@5479.72,4285.98 5479.72,4639.72 5585,4745 5705,4745 C21.1@6070,4745
SPS_12V: D5.2 J7.1 J7.2 J7.3 J7.4 J7.5 J7.6 J7.7 J7.8 J7.9 J7.10 J7.11 J7.12 J7.13 | length 13100
  Top Layer w40: 145,7555 152.48,7547.52 J7.4@295,7547.52 ; 145,7630 148.74,7626.26 J7.6@295,7626.26 ; 145,7705 J7.8@295,7705 ; 145,7785 146.26,7783.74 J7.10@295,7783.74 ; 145,7865 147.52,7862.48 J7.12@295,7862.48 ; 166.22,7468.78 J7.2@295,7468.78 ; J7.13@373.74,7941.22 J7.11@373.74,7862.48 ; J7.2@295,7468.78 J7.4@295,7547.52 ; J7.2@295,7468.78 J7.1@373.74,7468.78 J7.3@373.74,7547.52 ; J7.4@295,7547.52 J7.3@373.74,7547.52 ; J7.4@295,7547.52 J7.6@295,7626.26 ; J7.6@295,7626.26 J7.5@373.74,7626.26 ; J7.6@295,7626.26 J7.8@295,7705 ; J7.8@295,7705 J7.10@295,7783.74 ; J7.8@295,7705 J7.7@373.74,7705 ; J7.10@295,7783.74 J7.12@295,7862.48 ; J7.10@295,7783.74 J7.9@373.74,7783.74 ; J7.12@295,7862.48 J7.11@373.74,7862.48 ; J7.3@373.74,7547.52 J7.5@373.74,7626.26 ; J7.5@373.74,7626.26 J7.7@373.74,7705 ; J7.7@373.74,7705 J7.9@373.74,7783.74 ; J7.9@373.74,7783.74 J7.11@373.74,7862.48
  Top Layer w80: 145,7475 145,7555 145,7630 145,7705 145,7785 145,7865 145,8600 545,9000 6130,9000 6580,8550 6580,6455 6135,6010 D5.2@6135,5770
SRST: R2.2 U3.28 | length 256.1
  Top Layer w10: U3.28@2936.1,7883.5 2936.1,7991.56 2955,8010.46 ; R2.2@2955,8040 2955,8010.46 ; 2955,8010.46 ccw(c2926.34,8010.46) 2946.3,8031.03 cw(c2926.34,8010.46) 2955,8010.46 ; 2955,8010.46 cw(c2983.66,8010.46) 2963.7,8031.03 ccw(c2983.66,8010.46) 2955,8010.46
SYS_PWR: J4.2 J4.4 J5.2 J9.2 Q1.2 R34.2 RT1.2 U6.3 | length 12078.9
  Top Layer w50: v4(2065,4850) R34.2@2140,4850
  Top Layer w100: J5.2@424,2875 975,2875 ; J4.2@424,3655 603.58,3655 cw(c603.58,3555) 674.29,3625.71 820,3480 ; J4.4@424,4055 543.58,4055 cw(c543.58,3955) 614.29,4025.71 820,3820 ; J9.2@424,4625 665,4625 820,4470 820,3820 ; RT1.2@5685,1691.26 5775,1781.26 U6.3@5775,2160 5775,2660 5560,2875 975,2875 ; 820,3480 820,3071.42 ccw(c920,3071.42) 849.29,3000.71 975,2875 ; 820,3480 820,3820
  Bottom Layer w50: J9.2@424,4625 1165,4625 ; Q1.2@1335,5050 1335,4795 1165,4625 ; v4(2065,4850) 2065,4730 1960,4625 1165,4625 ; 484.36,4625 ccw(c484.36,4564.64) 441.68,4607.32 cw(c484.36,4564.64) 484.36,4625 ; 484.36,4625 cw(c484.36,4685.36) 441.68,4642.68 ccw(c484.36,4685.36) 484.36,4625
TD+: JW1.1 RW14.1 UW1.2 | length 2021.3
  Top Layer w8: JW1.1@687,6928.79 732.21,6974 v2(930,6974) RW14.1@979,6974 ; v2(1110,6905) 1640,6905 1723.26,6821.74 UW1.2@1767,6821.74 ; 713.56,6955.35 ccw(c740.12,6928.79) 702.56,6928.79 cw(c740.12,6928.79) 713.56,6955.35 ; 713.56,6955.35 cw(c687,6981.91) 687,6944.35 ccw(c687,6981.91) 713.56,6955.35 ; 727.22,6969.01 ccw(c767.44,6928.79) 710.56,6928.79 cw(c767.44,6928.79) 727.22,6969.01 ; 727.22,6969.01 cw(c687,7009.22) 687,6952.35 ccw(c687,7009.22) 727.22,6969.01 ; 905.86,6974 ccw(c905.86,6998.14) 922.93,6981.07 cw(c905.86,6998.14) 905.86,6974 ; 905.86,6974 cw(c905.86,6949.86) 922.93,6966.93 ccw(c905.86,6949.86) 905.86,6974 ; 946.41,6974 ccw(c946.41,7006.59) 969.45,6983.55 cw(c946.41,7006.59) 946.41,6974 ; 946.41,6974 cw(c946.41,6941.41) 969.45,6964.45 ccw(c946.41,6941.41) 946.41,6974 ; 954.14,6974 ccw(c954.14,6949.86) 937.07,6966.93 cw(c954.14,6949.86) 954.14,6974 ; 954.14,6974 cw(c954.14,6998.14) 937.07,6981.07 ccw(c954.14,6998.14) 954.14,6974 ; 1134.14,6905 ccw(c1134.14,6880.86) 1117.07,6897.93 cw(c1134.14,6880.86) 1134.14,6905 ; 1134.14,6905 cw(c1134.14,6929.14) 1117.07,6912.07 ccw(c1134.14,6929.14) 1134.14,6905
  Bottom Layer w8: v2(930,6974) 1096,6974 1110,6960 v2(1110,6905) ; 954.14,6974 ccw(c954.14,6949.86) 937.07,6966.93 cw(c954.14,6949.86) 954.14,6974 ; 954.14,6974 cw(c954.14,6998.14) 937.07,6981.07 ccw(c954.14,6998.14) 954.14,6974 ; 1110,6929.14 ccw(c1134.14,6929.14) 1117.07,6912.07 cw(c1134.14,6929.14) 1110,6929.14 ; 1110,6929.14 cw(c1085.86,6929.14) 1102.93,6912.07 ccw(c1085.86,6929.14) 1110,6929.14
TD-: JW1.2 RW18.1 UW1.1 | length 1602.7
  Top Layer w8: JW1.2@787,6878.79 978.79,6878.79 RW18.1@979,6879 979,6919 995,6935 1645,6935 1738.58,6841.42 UW1.1@1767,6841.42 ; 824.56,6878.79 ccw(c824.56,6841.22) 798,6867.79 cw(c824.56,6841.22) 824.56,6878.79 ; 824.56,6878.79 cw(c824.56,6916.35) 798,6889.79 ccw(c824.56,6916.35) 824.56,6878.79 ; 843.88,6878.79 ccw(c843.88,6821.91) 803.66,6862.13 cw(c843.88,6821.91) 843.88,6878.79 ; 843.88,6878.79 cw(c843.88,6935.66) 803.66,6895.45 ccw(c843.88,6935.66) 843.88,6878.79 ; RW18.1@969.45,6888.55 ccw(c946.41,6911.59) 979,6911.59 ; RW18.1@969.45,6888.55 cw(c945.9,6912.1) 945.9,6878.79 ccw(c945.9,6912.1) RW18.1@969.45,6888.55 ; RW18.1@969.45,6888.55 ccw(c946.41,6911.59) 979,6911.59 ; 979,6911.59 ccw(c1011.59,6911.59) 988.55,6888.55 cw(c1011.59,6911.59) 979,6911.59 ; 946.92,6878.79 cw(c946.92,6846.92) 969.45,6869.45 ccw(c946.92,6846.92) 946.92,6878.79 ; 1730.91,6849.09 ccw(c1747,6865.18) 1747,6842.42 cw(c1747,6865.18) 1730.91,6849.09
V3.3: C1.1 C5.2 C15.1 CU3.2 CU4.2 CU5.2 CU6.2 CU7.2 F2.2 FB1.1 FB2.1 FB3.1 FB5.2 JTAG1.1 JTAG1.2 LED1.1 LED2.1 LED3.1 LED4.1 LED5.1 LED6.1 LED7.1 LED8.1 LED9.1 LED10.1 LED11.1 LED12.1 LED13.1 LED14.1 LED15.1 LED16.1 LED17.1 LED18.1 LED19.1 LED20.1 LED21.1 R5.2 R6.2 R7.2 R10.2 R21.1 R40.2 R42.1 R46.1 R47.1 U1.3 U3.1 U3.19 U3.32 U3.48 U3.64 | length 25128.6
  Top Layer w10: CU5.2@2660,7485 2660,7510 ; U3.48@2786.5,7517.36 2667.36,7517.36 2660,7510 ; CU6.2@2810,7975 2840,7975 ; U3.32@2857.36,7883.5 2857.36,7957.64 2840,7975 ; U3.19@3113.27,7883.5 3113.27,7938.27 3155,7980 CU7.2@3155,8030 ; U3.64@3152.64,7446.5 3152.64,7410 3162.64,7400 3445,7400 CU4.2@3450,7395 ; U3.1@3223.5,7517.36 CU3.2@3447.36,7517.36 ; 2660,7510 ccw(c2678.75,7510) 2667.5,7495 cw(c2678.75,7510) 2660,7510 ; 2660,7510 cw(c2641.25,7510) 2652.5,7495 ccw(c2641.25,7510) 2660,7510 ; 2840,7975 ccw(c2840,7945.25) 2818.88,7966.2 cw(c2840,7945.25) 2840,7975 ; 2840,7975 cw(c2840,8004.75) 2818.88,7983.8 ccw(c2840,8004.75) 2840,7975 ; 3155,7999.82 ccw(c3124.82,7999.82) 3146.16,8021.16 cw(c3124.82,7999.82) 3155,7999.82 ; 3155,7999.82 cw(c3185.18,7999.82) 3163.84,8021.16 ccw(c3185.18,7999.82) 3155,7999.82 ; 3419.82,7400 ccw(c3419.82,7430.18) 3441.16,7408.84 cw(c3419.82,7430.18) 3419.82,7400 ; 3419.82,7400 cw(c3419.82,7369.82) 3441.16,7391.16 ccw(c3419.82,7369.82) 3419.82,7400 ; U3.64@3153.54,7416.97 ccw(c3172.55,7416.97) 3159.11,7403.53 cw(c3172.55,7416.97) U3.64@3153.54,7416.97 ; 3413.45,7517.36 ccw(c3413.45,7556.55) 3441.16,7528.84 cw(c3413.45,7556.55) 3413.45,7517.36 ; 3426.19,7517.36 cw(c3426.19,7496.19) 3441.16,7511.16 ccw(c3426.19,7496.19) 3426.19,7517.36
  Top Layer w20: U1.3@2260,7615 2355,7615 C1.1@2360,7620 ; 2329.82,7615 ccw(c2329.82,7650.18) 2354.7,7625.3 cw(c2329.82,7650.18) 2329.82,7615
  Top Layer w30: v2(1440,6415) FB2.1@1440,6470 ; v2(2130,6200) FB1.1@2130,6292.5 ; R21.1@2205,5660 v2(2205,5710) ; C1.1@2360,7620 v1(2420,7620) ; v1(2660,7455) CU5.2@2660,7485 ; CU6.2@2810,7975 v1(2810,8030) ; R5.2@2850,7210 R6.2@2930,7210 R7.2@3015,7210 R10.2@3095,7210 3095,7105 3130,7070 3345,7070 ; CU7.2@3155,8030 v1(3205,8030) ; R42.1@3285,4900 v2(3285,4950) ; 3309.65,7071.16 ccw(c3295,7120) 3345,7110 ccw(c3395,7120) 3380.35,7071.16 ; C5.2@3450,7275 3375,7275 3345,7245 3345,7070 ; CU3.2@3450,7520 v1(3450,7470) 3450,7395 3450,7290 3465,7275 FB5.2@3570,7275 ; JTAG1.2@3505,6810 JTAG1.1@3505,6910 3505,7030 3465,7070 3345,7070 ; FB3.1@3705,7885 v1(3705,7925) ; C15.1@4864.94,6105 R40.2@4944.94,6105 4944.94,6055 ; R47.1@6370,7445 6379.64,7445 cw(c6379.64,7359.64) 6440,7420 ; R46.1@6370,7865 6379.64,7865 cw(c6379.64,7779.64) 6440,7840 ; 3505,6851.21 ccw(c3541.21,6851.21) 3515.61,6825.61 cw(c3541.21,6851.21) 3505,6851.21 ; 3505,6851.21 cw(c3468.79,6851.21) 3494.39,6825.61 ccw(c3468.79,6851.21) 3505,6851.21 ; 3505,6868.79 ccw(c3468.79,6868.79) 3494.39,6894.39 cw(c3468.79,6868.79) 3505,6868.79 ; 3505,6868.79 cw(c3541.21,6868.79) 3515.61,6894.39 ccw(c3541.21,6868.79) 3505,6868.79 ; 3505,6951.21 ccw(c3541.21,6951.21) 3515.61,6925.61 cw(c3541.21,6951.21) 3505,6951.21 ; 3505,6951.21 cw(c3468.79,6951.21) 3494.39,6925.61 ccw(c3468.79,6951.21) 3505,6951.21
  Top Layer w40: LED20.1@805,8885 1665,8885 2830,8885 4275,8885 4760,8885 6000,8885 6440,8445 6440,7840 6440,7420 6440,6565 6005,6130 6005,5825 5905,5725 4999.97,5725 ; 4944.94,5670 cw(c4999.97,5669.97) 4999.97,5725 ; 4944.94,6055 4944.94,5790 ; 4945,5725 4999.97,5725 ; 4995,5725 cw(c5002.47,5782.53) 4944.94,5775.06 ; F2.2@5167.01,5160 5010,5160 4944.94,5225.06 4944.94,5775.06 ; 4944.94,5775.06 cw(c5002.47,5782.53) 4944.94,5790 ; 4944.94,5775.06 4944.94,5790
  Bottom Layer w30: v2(1440,6415) 1440,5935 1465,5910 1495,5910 ; 2075,5910 ccw(c2072.5,5967.5) 2130,5965 ; v2(2130,6200) 2130,5965 ; 2140,5910 2130,5920 2130,5965 ; 2165,5910 cw(c2162.5,5867.5) 2205,5870 ; 2185,5910 cw(c2187.5,5967.5) 2130,5965 ; v2(2205,5710) 2205,5870 ; 2205.02,5865.29 cw(c2252.5,5862.5) 2250,5910 cw(c2252.5,5862.5) 2255,5910 ; 2205,5910 2205,5870 ; v1(2660,7455) 2475,7455 2420,7510 v1(2420,7620) 2420,7975 2475,8030 v1(2810,8030) v1(3205,8030) 3415,8030 3450,7995 3450,7974.9 ccw(c3500,7975) 3500,7925 ; 3235,5910 cw(c3237.5,5862.5) 3240,5910 cw(c3237.5,5862.5) 3285,5865 cw(c3330,5865) 3330,5910 ; v2(3285,4950) 3285,5905 ; v1(3450,7470) 3450,7870 ; 3450,7875 3450,7920 ; 3455,7925 3500,7925 ; 3465,5910 ccw(c3465,5950) 3505,5950 ; 3505,5910 3505,5950 ; JTAG1.2@3505,6810 3505,5950 ; 3545,5910 cw(c3545,5950) 3505,5950 ; 3580,5905 3580,5910 ; v1(3705,7925) 3500,7925 ; 3505,6768.79 ccw(c3468.79,6768.79) 3494.39,6794.39 cw(c3468.79,6768.79) 3505,6768.79 ; 3505,6768.79 cw(c3541.21,6768.79) 3515.61,6794.39 ccw(c3541.21,6768.79) 3505,6768.79
  Bottom Layer w40: 1495,5910 2140,5910 2165,5910 2205,5910 2250,5910 2255,5910 3235,5910 3240,5910 3330,5910 3465,5910 3505,5910 3545,5910 3580,5910 v3@4944.94,5910
  other v3: 4945,5910
V3.3A: CU1.1 CU2.1 FB3.2 U3.13 | length 589.2
  Top Layer w10: U3.13@3223.5,7753.58 3343.58,7753.58 3420,7830 CU1.1@3460,7830 ; 3429.82,7830 ccw(c3429.82,7860.18) 3451.16,7838.84 cw(c3429.82,7860.18) 3429.82,7830 ; 3429.82,7830 cw(c3429.82,7799.82) 3451.16,7821.16 ccw(c3429.82,7799.82) 3429.82,7830
  Top Layer w30: CU1.1@3460,7830 3460,7870 3475,7885 CU2.1@3550,7885 FB3.2@3640,7885
pads on no net: JW1.0 JW1.7 Q1.0 U1.5 U1.8 U3.2 U3.3 U3.4 U3.6 U3.8 U3.51 U3.52 U3.53 U3.54 U3.57 U3.58 U3.59 U5.3 U5.5 UW1.7 UW1.12 UW1.13 UW1.18 UW1.24 UW1.26 UW1.46 UW1.47 Y2.1

## Polygon pours and split planes (outlines as drawn)
DGND on Top Layer "Top Layer-No Net" (hatched 90Degree grid 0 track 15, remove dead copper, pour order 1000): 100,6075 3755,6075 3764.58,6075 3815.55,6024.03 3822.5,6017.08 3822.5,5840 3822.5,5097.74 3752.26,5027.5 3740,5027.5 3072.5,5027.5 3070,5025 3070,4480 3075,4480 3080,4475 6600,4475 6600,8540 6605,8545 6355,8795 5940,8795 310,8795 270,8755 100,8585 100,6085
DGND on Top Layer "Top Layer-No Net" (hatched 90Degree grid 0 track 15, pour order 1001): 2806.81,7416.97 2808.54,7415 3185.61,7415 3185.61,7910 3190,7915 2755,7915 2755,7420 2757.66,7416.97 2806.81,7416.97
DGND on Top Layer "Top Layer-No Net" (hatched 90Degree grid 0 track 15, pour order 1002): 1872.78,6535 2140.68,6535 2140.68,6880.51 2145,6885 2140.68,6880.51 1795,6880.51 1795,6543.97 1799.32,6539.49 1803.64,6535 1872.78,6535
DGND on Top Layer "Top Layer-No Net" (hatched 90Degree grid 0 track 15, pour order 1003): 1489,6075 1490,6074 1490,5965 3725,5965 3725,6075 1489,6075
DGND on Bottom Layer "Top Layer-No Net" (hatched 90Degree grid 0 track 15, remove dead copper, pour order 1004): 3065,4475 6595,4475 6595,8575 6545,8625 6165,9005 6160,9000 465,9000 130,8665 105,8640 100,8635 100,6980 100,6075 1440,6075 1440,5935 1465,5910 1470,5905 3285,5905 3285,4950 3070,4735 3070,4710 3070,4735 3065,4730 3065,4475

## Keep-outs
Keep-Out Layer:
  lines w10: 0,9138 0,53.15 ccw(c53.15,53.15) 53.15,0 6797.24,0 ; 0.15,9133.86 cw(c53.3,9133.86) 53.3,9187.01 ; 55,9187.01 6795,9187.01 cw(c6794,9131) 6850,9130 6850.39,50 ; 6797.24,0.15 ccw(c6797.24,53.3) 6850.39,53.3

## Silkscreen, mask and mechanical layers (free items; w line width, h text height)
Top Overlay:
  lines w10: 615,8755 995,8755 ; 850,3245 1500,3245 ; 850,3495 1500,3495 3955,3495 ; 850,3595 1500,3595 3955,3595 ; 850,3855 1625,3855 3955,3855 ; 855,4115 3955,4115 ; 860,3980 3955,3980 ; 995,8560 610,8560 610,8965 995,8965 995,8565 ; 1320,8690 1320,8965 ; 1500,3980 1500,3245 ; 1555,8690 1555,8965 ; 1780,8965 1785,8965 1785,8695 ; 2010,8690 2010,8965 ; 2255,8690 2255,8965 ; 2485,8690 2485,8965 ; 2715,8695 2715,8965 ; 2945,8690 2945,8965 ; 3170,8690 3170,8965 ; 3716.38,8600 3716.38,8965 5005,8965 5005,8560 3716.38,8560 3716.38,8690 5005,8690 ; 3881.38,8690 3881.38,8965 ; 3955,3245 1500,3245 ; 3955,3370 1500,3370 850,3370 ; 4041.38,8690 4041.38,8965 ; 4201.38,8690 4201.38,8965 ; 4361.38,8690 4361.38,8965 ; 4521.38,8690 4521.38,8965 ; 4681.38,8690 4681.38,8965 ; 4841.38,8690 4841.38,8965 ; 5280,8755 5805,8755 ; 5555,8965 5555,8565 ; 850,3370 850,4270 3955,4270 3955,1425 850,1425 850,2935 850,3370 ; 1105,8690 1105,8965 3435,8965 3435,8690 ; 1105,8690 3435,8690 ; 1105,8690 1105,8560 1110,8560 3435,8560 3435,8690 ; 5555,8565 5280,8565 5280,8965 5805,8965 5805,8565 5555,8565
  text "CPU" at 3750,8710 h40
  text "COU" at 3905,8710 h40
  text "SSU" at 4080,8710 h40
  text "PDU" at 4240,8710 h40
  text "DET" at 4400,8710 h40
  text "IOU" at 4570,8710 h40
  text "MAU" at 4710,8710 h40
  text "MFU" at 4880,8710 h40
  text "测试完成" at 635,8670 h100
  text "RUN" at 5360,8650 h40
  text "PWR" at 5645,8650 h40
  text "故障指示灯" at 1950,8595 h100
  text "待测板测试指示灯" at 3985,8595 h100
  text "指示灯" at 675,8580 h100
  text "RESET" at 6013.27,7647.82 h40
  text "测试MFU" at 5953.27,7202.82 h80
  text "L50T单板测试辅助板" at 3040,5697.47 h200
  text "MFU" at 160,5540 h50
  text "OUT" at 499,5405 h40
  text "FUSE" at 499,5195 h40
  text "EN" at 499,4995 h40
  text "FLASH" at 499,4800 h40
  text "L" at 499,4605 h40
  text "N" at 499,4405 h40
  text "PDU" at 164,4170 h50
  text "测试板接口接线说明：" at 880,4165 h100
  text "L" at 505,4030 h40
  text "测试板接口" at 965,4015 h100
  text "要连接的待测板接口" at 2685,4015 h100
  text "OUT和FUSE连接MFU板J2接口，其余连接MFU板J1接口" at 1525,3885 h100
  text "J9" at 1100,3880 h100
  text "N" at 505,3830 h40
  text "J1接口(SSU板、PDU板、DET板、IOU板)" at 1530,3760 h100
  text "J7" at 1100,3695 h100
  text "J4接口(CPU板、COU板、MAU板)" at 1515,3635 h100
  text "L" at 505,3630 h40
  text "SSU板J3接口" at 1530,3515 h100
  text "J5" at 1100,3510 h100
  text "N" at 505,3430 h40
  text "J4" at 1100,3400 h100
  text "PDU板J4接口" at 1530,3395 h100
  text "J2" at 1100,3280 h100
  text "DET板P1接口" at 1530,3275 h100
  text "SSU" at 164,3190 h50
  text "测试板测试流程：" at 880,3110 h100
  text "PG" at 500,3050 h40
  text "1、按照接线示意图连接待测板和测试板,上电测试；" at 1050,3005 h100
  text "2、测试板的蜂鸣器发出声响，并且“测试完成指示灯”亮起，待测板测试结" at 1050,2890 h100
  text "SYS_L" at 499,2855 h40
  text "束（COU板的测试不借助测试板，COU板的“LED2”亮起，表示COU板" at 1190,2780 h100
  text "测试结束）；" at 1185,2680 h100
  text "SYS_N" at 500,2645 h40
  text "3、记录测试结果，将测试板的故障指示灯LED1-LED10、待测板的LED、" at 1050,2575 h100
  text "待测板蜂鸣器和继电器的发声情况记录到对应的记录表中（LED亮填入" at 1185,2480 h100
  text "DET" at 165,2470 h50
  text "√，熄灭填入×；蜂鸣器响填入√，不响填入×；继电器连续响4声填" at 1185,2380 h100
  text "入√，否则填入×）；" at 1185,2280 h100
  text "CH1" at 609,2105 h40
  text "注意事项：" at 885,2085 h100
  text "1、MFU板上电后，需要按下测试板的“测试MFU”按键（S2）启动MFU板" at 1050,1975 h100
  text "CH2" at 609,1905 h40
  text "测试；" at 1180,1880 h100
  text "2、SSU板测试过程中，注意听继电器的声音，连续发出4次声音，继电器" at 1050,1785 h100
  text "AC_L" at 5900,1755 h50
  text "CH3" at 609,1705 h40
  text "电路判定OK；" at 1185,1680 h100
  text "3、MAU板测试过程中，注意听蜂鸣器是否发出声音，有声音则判定蜂鸣" at 1050,1580 h100
  text "CH4" at 609,1505 h40
  text "器电路OK。" at 1185,1485 h100
  text "AC_N" at 5890,1370 h50
  text "CH5" at 609,1305 h40
  text "CH6" at 609,1105 h40
  text "PG" at 5905,995 h50
  text "CH7" at 609,900 h40
  text "LOOP8" at 1045,745 h40 r315
  text "LOOP5" at 1625,745 h40 r315
  text "LOOP4" at 1810,745 h40 r315
  text "LOOP3" at 2035,745 h40 r315
  text "LOOP2" at 2230,745 h40 r315
  text "LOOP1" at 2440,745 h40 r315
  text "LOOP6" at 1420,740 h40 r315
  text "LOOP7" at 1230,725 h40 r315
  text "CH8" at 609,700 h40
  text "COIL" at 2910,280 h60

## Text inside footprints (layer, text, board x,y; h text height)
U6: Top Overlay "FG" at 4421.85,2297.52 h59.06 r90; Top Overlay "N" at 5116.85,2317.52 h59.06 r90; Top Overlay "L" at 5801.85,2317.52 h59.06 r90; Top Overlay "-V" at 4721.85,4042.52 h59.06 r90; Top Overlay "+V" at 5511.85,4042.52 h59.06 r90; Top Overlay "AC-DC" at 5116.85,2942.52 h118.11 r90